# Altium PCB PCB1.PcbDoc
Units mm, origin at the board's own origin, x right, y up, seen from the top; angles counter-clockwise.
Board outline 152.4 x 101.6 mm, 2 copper layers (Top Layer, Bottom Layer); 78 components, 57 nets, 289 pads, 10 vias.
Unrouted connection lines stored in the file: 190.
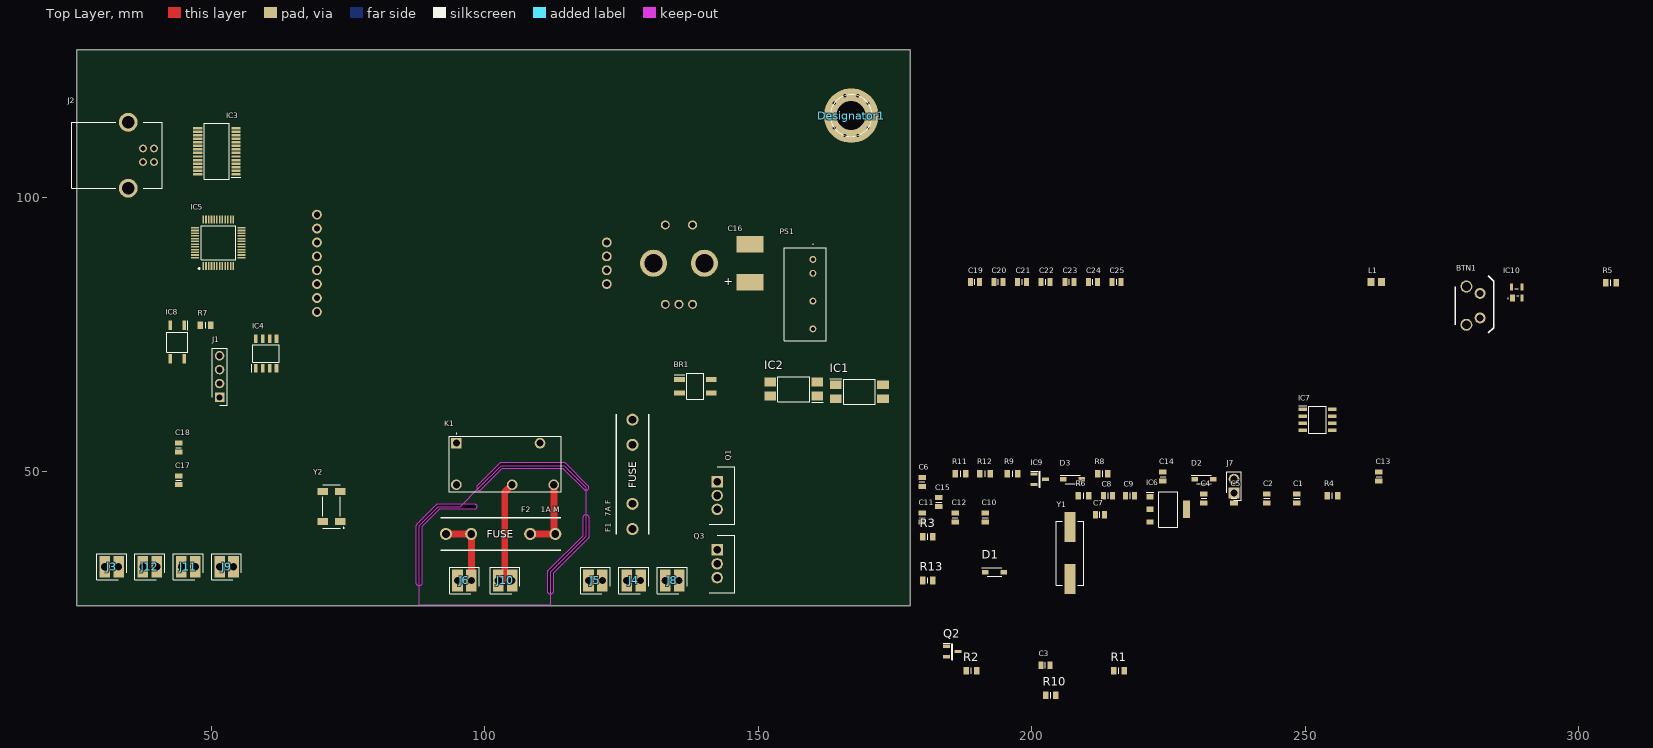
[diagram p0: Top Layer view]
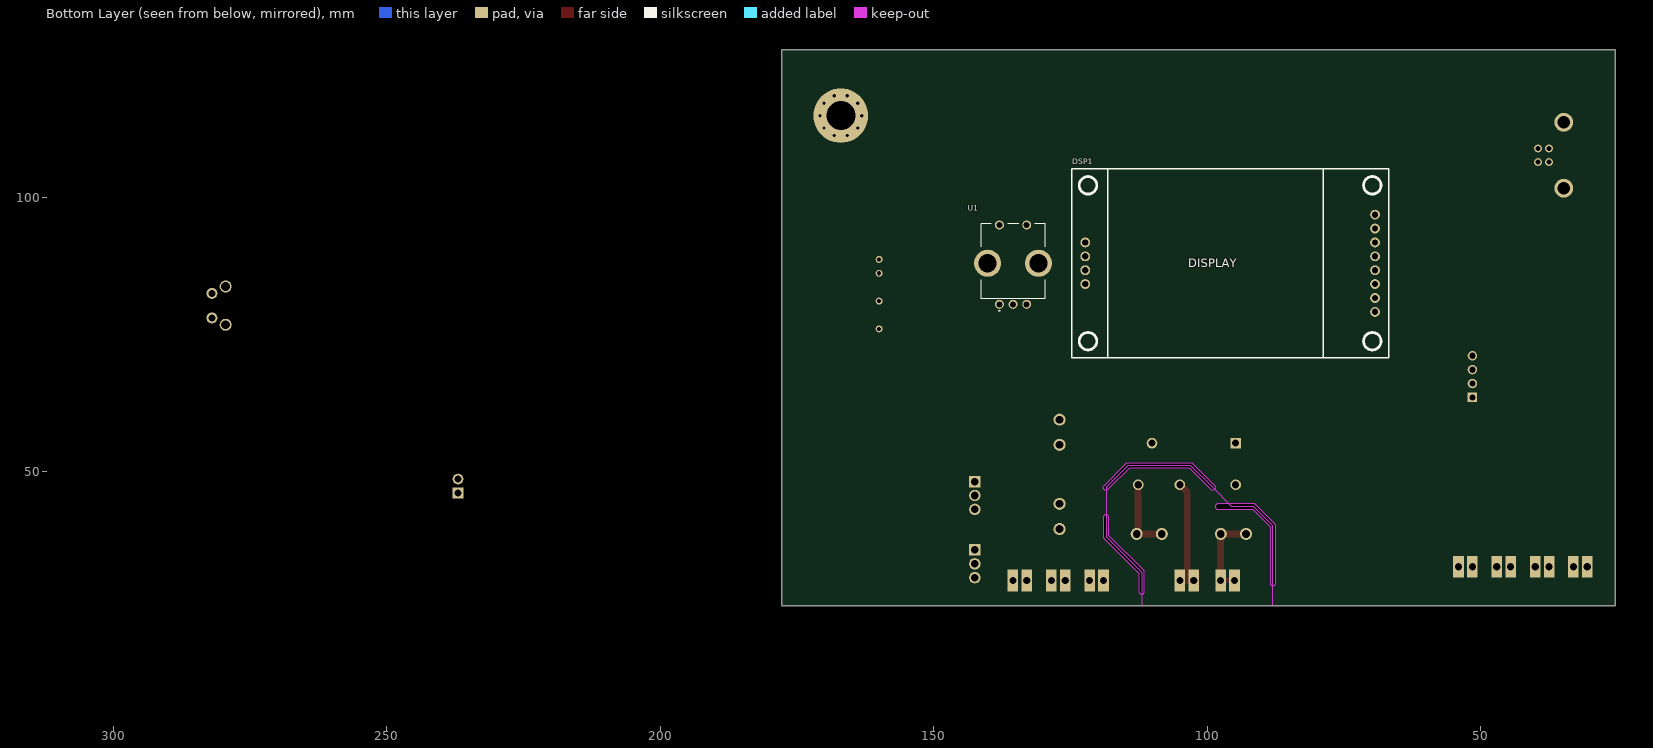
[diagram p1: Bottom Layer view, seen from below]

## Layer stack, top to bottom
Top Solder: solder mask 0.0102, Solder Resist, Dk 3.5
Top Layer: signal copper 0.0356
Dielectric 1: dielectric 0.32, FR-4, Dk 4.8
Bottom Layer: signal copper 0.0356
Bottom Solder: solder mask 0.0102, Solder Resist, Dk 3.5

## Board outline
25.4,25.4 177.8,25.4 177.8,127 25.4,127
cut-out: 98.641,47.359 ccw(c99,47) 99.359,46.641 103.211,50.492 114.289,50.492 118.141,46.641 ccw(c118.5,47) 119.008,47 ccw(c118.5,47) 118.859,47.359 114.859,51.359 114.86,51.359 ccw(c114.5,51) 114.5,51.508 103,51.508 ccw(c103,51) 102.64,51.359
cut-out: 87.492,29.5 87.492,40 cw(c88,40) 87.641,40.36 87.641,40.359 91.141,43.859 91.14,43.859 cw(c91.5,43.5) 91.5,44.008 98,44.008 cw(c98,43.5) 98.508,43.5 cw(c98,43.5) 98,42.992 91.711,42.992 88.508,39.789 88.508,29.5 cw(c88,29.5)
cut-out: 111.492,28 111.492,31.5 cw(c112,31.5) 111.641,31.86 111.641,31.859 117.992,38.211 117.992,41.5 cw(c118.5,41.5) 119.008,41.5 119.008,38 cw(c118.5,38) 118.859,37.64 118.859,37.641 112.508,31.289 112.508,28 cw(c112,28)

## Design rules (kind name [scope] priority, off if disabled: settings)
Clearance [All] p1: gap=0.254 ignorepadtopadclearanceinfootprint=FALSE except(0: Arc-Hole Track-Hole SMDPad-Hole THPad-Hole Via-Hole Fill-Hole Poly-Hole Region-Hole Text-Hole)
PolygonConnect [All] p1: connectstyle=Relief reliefconductorwidth=0.254 reliefentries=4 polygonreliefangle="90 Angle" airgapwidth=0.254
RoutingVias [All] p1: holewidth=0.711 width=1.27 viastyle="Through Hole" minholewidth=0.711 minwidth=1.27 maxholewidth=0.711 maxwidth=1.27
SolderMaskExpansion [All] p1: expansion=0.102 istentingtop=FALSE
Width [All] p1: maxlimit=0.254 minlimit=0.254 preferedwidth=0.254
30 further rules are at their usual default settings.

## Components (designator, comment, footprint, x,y, rotation, side; value= is the part's Value field where it differs from the comment)
BR1 "MB10FTR" SOP250P670X160-4N 138.5,65.5 r0 top
BTN1 "SMD Button 6x6mm Angled" "SMD Button 6x6 Angled" 279.5,76.75 r90 top
C1 "100nF" "CAPC2012 METRIC" 248.5,45 r90 top
C2 "10uF" "CAPC2012 METRIC" 243,45 r90 top
C3 "100nF" "CAPC2012 METRIC" 202.5,14.5 r0 top
C4 "100nF" "CAPC2012 METRIC" 231.5,45 r90 top
C5 "100nF" "CAPC2012 METRIC" 237,45 r90 top
C6 "100nF" "CAPC2012 METRIC" 179.959,48.006 r90 top
C7 "22pF" "CAPC2012 METRIC" 212.5,42 r0 top
C8 "1uF" "CAPC2012 METRIC" 214,45.5 r0 top
C9 "10uF" "CAPC2012 METRIC" 218,45.5 r0 top
C10 "22pF" "CAPC2012 METRIC" 191.5,41.5 r90 top
C11 "10pF" "CAPC2012 METRIC" 180,41.5 r90 top
C12 "10pF" "CAPC2012 METRIC" 186,41.5 r90 top
C13 "100nF" "CAPC2012 METRIC" 263.499,49 r90 top
C14 "1nF" "CAPC2012 METRIC" 224,49 r90 top
C15 "10uF" "CAPC2012 METRIC" 183,44.32 r90 top
C16 "D 100uF" TANTAL-D 148.5,88 r180 top
C17 "1uF" "CAPC2012 METRIC" 44,48.32 r90 top
C18 "10uF" "CAPC2012 METRIC" 44,54.3 r90 top
C19 "1uF" "CAPC2012 METRIC" 189.611,84.582 r0 top
C20 "10nF" "CAPC2012 METRIC" 193.929,84.582 r0 top
C21 "100nF" "CAPC2012 METRIC" 198.247,84.582 r0 top
C22 "100nF" "CAPC2012 METRIC" 202.565,84.582 r0 top
C23 "100nF" "CAPC2012 METRIC" 206.883,84.582 r0 top
C24 "100nF" "CAPC2012 METRIC" 211.201,84.582 r0 top
C25 "4.7uF" "CAPC2012 METRIC" 215.519,84.582 r0 top
D1 "1N5819" SOD3716X145N 193.2,31.5 r0 top
D2 "1N5819" SOD3716X145N 231.5,48.5 r0 top
D3 "1N5819" SOD3716X145N 207.5,48.5 r0 top
Designator1 "Comment" "DRILL HOLE M5" 167,115 r0 top
DSP1 "1.8 In TFT Display" "1.8 Inch TFT Display" 98.5,88 r180 bottom
F1 "7A F" "Fuse Holder 5x20mm" 127,39.4 r90 top
F2 "1A F" "Fuse Holder 5x20mm" 92.9,38.5 r0 top
IC1 "PC817" SOP254P975X460-4N 168.5,64.5 r0 top
IC2 "PC817" SOP254P975X460-4N 156.5,65 r180 top
IC3 "FT232RL" SOP65P778X200-28N 51,108.5 r180 top
IC4 "MAX6675ISA" SOIC127P600X175-8N 60,71.5 r90 top
IC5 "STM32F103C6T6A" QFP50P900X900X160-48N 51.262,91.75 r90 top
IC6 "AMS1117-3.3" SOT229P700X180-4N 225,43 r0 top
IC7 "ACS712 20A" SOIC127P600X175-8N 252.288,59.365 r0 top
IC8 "VOM1271T" SOP254P675X240-4N 43.73,73.575 r270 top
IC9 "BC846BLT1G" SOT96P237X111-3N 201.5,48.5 r0 top
IC10 "MAX811TEUS+" MAX811REUST 288.671,82.677 r0 top
J1 "PROG" HDRV4W95P0X254_1X4_1016X254X854P 51.5,63.46 r90 top
J2 "USB Type B" SS52300001 39.5,109 r270 top
J3 "Base" "2 Pin Header BIG PADS" 33.04,32.5 r180 top
J4 "24VA" "2 Pin Header BIG PADS" 128.5,30 r180 top
J5 "PE In" "2 Pin Header BIG PADS" 121.5,30 r180 top
J6 "230V In" "2 Pin Header BIG PADS" 97.54,30 r180 top
J7 "Power BTN" HDRV2W110P0X254_1X2_508X254X854P 237,46 r90 top
J8 "24VB" "2 Pin Header BIG PADS" 135.54,30 r180 top
J9 "JBC Red" "2 Pin Header BIG PADS" 54.04,32.5 r180 top
J10 "230V SW" "2 Pin Header BIG PADS" 105,30 r180 top
J11 "JBC Blue" "2 Pin Header BIG PADS" 47.04,32.5 r180 top
J12 "JBC Green" "2 Pin Header BIG PADS" 40,32.5 r180 top
K1 "SJE-S-105L-F" SJES105LF 94.8,55.1 r0 top
L1 "39nH" LIRD-LI0805H151R-10-2_V 263.017,84.582 r0 top
PS1 "TMR 1-2411" TMR10511 160,88.7 r270 top
Q1 "IRFZ44PBF" TO254P465X1024X2050-3P 142.5,48.08 r270 top
Q2 "BSS138LT1G" SOT96P237X111-3N 185.5,17 r0 top
Q3 "IRFZ44PBF" TO254P465X1024X2050-3P 142.5,35.58 r270 top
R1 "2k" RESC2012X65N 215.95,13.5 r0 top
R2 "10k" RESC2012X65N 189,13.5 r0 top
R3 "10k" RESC2012X65N 181,38 r0 top
R4 "10k" RESC2012X65N 254.999,45.5 r0 top
R5 "10k" RESC2012X65N 305.943,84.455 r0 top
R6 "10k" RESC2012X65N 209.5,45.5 r0 top
R7 "330" RESC2012X65N 48.95,76.65 r0 top
R8 "2k" RESC2012X65N 213,49.5 r0 top
R9 "2k" RESC2012X65N 196.5,49.5 r0 top
R10 "1k" RESC2012X65N 203.5,9 r0 top
R11 "10k" RESC2012X65N 187,49.5 r0 top
R12 "200k" RESC2012X65N 191.5,49.5 r0 top
R13 "200k" RESC2012X65N 181,30 r0 top
U1 "Encoder" EC11B152442D 135.5,87.512 r180 bottom
Y1 "HC-49S 8MHz" FOX-HC49SDLF_V 207,35 r90 top
Y2 "MC-306 32.768kHz" MC306327680KA3ROHS 72,43.5 r90 top

## Footprints (in the part's own frame and the unit in brackets; to place one, negate y for a bottom-side part, rotate by r counter-clockwise, add the part's x,y. Pads: shape width x height; smd on the part's side, far side on the other; paste and mask are expansions set on the pad)
"1.8 Inch TFT Display" [mm]
  round 1.8 hole 1.15: 1(29.2,8.89) 2(29.2,6.35) 3(29.2,3.81) 4(29.2,1.27) 5(29.2,-1.27) 6(29.2,-3.81) 7(29.2,-6.35) 8(29.2,-8.89) 9(-23.8,3.81) 10(-23.8,1.27) 11(-23.8,-1.27) 12(-23.8,-3.81)
  silkscreen extent -26.3,-17.25 31.7,17.25
"2 Pin Header BIG PADS" [mm]
  rect 1.95x4 hole 1.3: 1(0,0) 2(2.54,0)
  silkscreen extent -1.4,-2.4 3.99,2.42
"CAPC2012 METRIC" [mm]
  rect 0.91x1.39 smd: 1(-0.82,0) 2(0.82,0)
  silkscreen extent 0,-0.53 0,0.53, body extent -1,-0.63 1,0.63, height 0.95
"DRILL HOLE M5" [mm]
  round 10 hole 5.3 mask+0: 1(0,0)
  silkscreen extent -3.82,-3.82 3.83,3.82
EC11B152442D [mm]
  round 1.65 hole 1.1: A(-2.5,-7.012) B(2.5,-7.012) C(0,-7.012) MH3(-2.5,7.488) MH4(2.5,7.488)
  round 4.95 hole 3.3: MH1(-4.65,0.488) MH2(4.65,0.488)
  silkscreen extent -5.85,-8.31 5.85,7.74, body extent -6.19,-7.46 6.2,7.94, height 31.1
FOX-HC49SDLF_V [mm] "SMD, 2-Leads, Body 5x11.7mm"
  rect 5.5x2 smd: 1(-4.75,0) 2(4.75,0)
  silkscreen extent -5.85,-2.5 5.85,2.5, body extent -6.15,-2.35 6.15,2.35, height 4.34
"Fuse Holder 5x20mm" [mm]
  round 2.2 hole 1.4: 1(0,0) 1(4.6,0) 2(15.4,0) 2(20,0)
  silkscreen extent -1,-3 21,3
HDRV2W110P0X254_1X2_508X254X854P [mm]
  rect 1.95x1.95 hole 1.3: 1(0,0)
  round 1.95 hole 1.3: 2(2.54,0)
  silkscreen extent -1.35,-1.35 3.89,1.35, body extent -1.27,-1.27 3.81,1.27, height 8.54
HDRV4W95P0X254_1X4_1016X254X854P [mm]
  rect 1.725x1.725 hole 1.15: 1(0,0)
  round 1.725 hole 1.15: 2(2.54,0) 3(5.08,0) 4(7.62,0)
  silkscreen extent -1.42,-1.37 9.04,1.37, body extent -1.27,-1.27 8.89,1.27, height 8.54
LIRD-LI0805H151R-10-2_V [mm] "Chip, 2-Leads, Body 2.2x1.45mm"
  rect 1.285x1.47 smd: 1(-0.972,0) 2(0.972,0)
  body extent -1.1,-0.72 1.1,0.73, height 1.1
MAX811REUST [mm]
  rect 0.94x1.31 smd: 1(-0.765,-1)
  rect 0.55x1.31 smd: 2(0.96,-1) 3(0.96,1) 4(-0.96,1)
  silkscreen extent -1.6,-1.15 0.4,0.65
MC306327680KA3ROHS [mm]
  rect 1.3x1.9 smd: 1(-2.75,-1.6) 2(2.75,-1.6) 3(2.75,1.6) 4(-2.75,1.6)
  silkscreen extent -4,-2.3 4,1.6, body extent -4,-2.42 4,2.42, height 2.64
QFP50P900X900X160-48N [mm]
  rect 1.475x0.3 smd mask+0.127: 1(-4.238,2.75) 2(-4.238,2.25) 3(-4.238,1.75) 4(-4.238,1.25) 5(-4.238,0.75) 6(-4.238,0.25) 7(-4.238,-0.25) 8(-4.238,-0.75) 9(-4.238,-1.25) 10(-4.238,-1.75) 11(-4.238,-2.25) 12(-4.238,-2.75) 25(4.238,-2.75) 26(4.238,-2.25) 27(4.238,-1.75) 28(4.238,-1.25) 29(4.238,-0.75) 30(4.238,-0.25) 31(4.238,0.25) 32(4.238,0.75) 33(4.238,1.25) 34(4.238,1.75) 35(4.238,2.25) 36(4.238,2.75)
  rect 0.3x1.475 smd mask+0.127: 13(-2.75,-4.238) 14(-2.25,-4.238) 15(-1.75,-4.238) 16(-1.25,-4.238) 17(-0.75,-4.238) 18(-0.25,-4.238) 19(0.25,-4.238) 20(0.75,-4.238) 21(1.25,-4.238) 22(1.75,-4.238) 23(2.25,-4.238) 24(2.75,-4.238) 37(2.75,4.238) 38(2.25,4.238) 39(1.75,4.238) 40(1.25,4.238) 41(0.75,4.238) 42(0.25,4.238) 43(-0.25,4.238) 44(-0.75,4.238) 45(-1.25,4.238) 46(-1.75,4.238) 47(-2.25,4.238) 48(-2.75,4.238)
  silkscreen extent -4.85,-3.15 3.15,3.62, body extent -4.5,-4.5 4.5,4.5, height 1.6
RESC2012X65N [mm]
  rect 1x1.4 smd: 1(-0.95,0) 2(0.95,0)
  silkscreen extent 0,-0.53 0,0.53, body extent -1,-0.63 1,0.63, height 0.65
SJES105LF [mm]
  rect 1.95x1.95 hole 1.3: 1(0,0)
  round 1.95 hole 1.3: 2(0,-7.6) 3(10.2,-7.6) 4(17.8,-7.6) 5(15.3,0)
  silkscreen extent -1.4,-8.9 19.2,1.8, body extent -1.4,-8.9 19.2,1.3, height 16.2
"SMD Button 6x6 Angled" [mm]
  round 2 hole 1.3: 1(1.25,-2.5) 2(5.75,-2.5)
  round 2.2 hole 1.6: 3(0,0) 4(7,0)
  silkscreen extent -1.5,-5.05 9,2
SOD3716X145N [mm]
  rect 1.2x0.75 smd: 1(-1.7,0) 2(1.7,0)
  silkscreen extent -2.3,-0.77 1.35,0.77, body extent -1.85,-0.77 1.85,0.77, height 1.45
SOIC127P600X175-8N [mm]
  rect 1.525x0.65 smd: 1(-2.712,1.905) 2(-2.712,0.635) 3(-2.712,-0.635) 4(-2.712,-1.905) 5(2.712,-1.905) 6(2.712,-0.635) 7(2.712,0.635) 8(2.712,1.905)
  silkscreen extent -3.47,-2.45 1.6,2.58, body extent -3,-2.45 3,2.45, height 1.75
SOP65P778X200-28N [mm]
  rect 1.7x0.45 smd: 1(-3.5,4.225) 2(-3.5,3.575) 3(-3.5,2.925) 4(-3.5,2.275) 5(-3.5,1.625) 6(-3.5,0.975) 7(-3.5,0.325) 8(-3.5,-0.325) 9(-3.5,-0.975) 10(-3.5,-1.625) 11(-3.5,-2.275) 12(-3.5,-2.925) 13(-3.5,-3.575) 14(-3.5,-4.225) 15(3.5,-4.225) 16(3.5,-3.575) 17(3.5,-2.925) 18(3.5,-2.275) 19(3.5,-1.625) 20(3.5,-0.975) 21(3.5,-0.325) 22(3.5,0.325) 23(3.5,0.975) 24(3.5,1.625) 25(3.5,2.275) 26(3.5,2.925) 27(3.5,3.575) 28(3.5,4.225)
  silkscreen extent -4.35,-5.14 2.3,5.14, body extent -3.89,-5.14 3.89,5.14, height 2
SOP250P670X160-4N [mm]
  rect 1.95x0.95 smd: 1(-2.9,1.25) 2(-2.9,-1.25) 3(2.9,-1.25) 4(2.9,1.25)
  silkscreen extent -3.88,-2.36 1.58,2.36, body extent -3.35,-2.36 3.35,2.36, height 1.6
SOP254P675X240-4N [mm]
  rect 1.75x0.65 smd: 1(-3.075,1.27) 2(-3.075,-1.27) 3(3.075,-1.27) 4(3.075,1.27)
  silkscreen extent -3.95,-1.92 1.85,1.94, body extent -3.37,-1.92 3.37,1.92, height 2.4
SOP254P975X460-4N [mm]
  rect 2.125x1.6 smd: 1(-4.312,1.27) 2(-4.312,-1.27) 3(4.312,-1.27) 4(4.312,1.27)
  silkscreen extent -5.37,-2.29 2.9,2.42, body extent -4.81,-2.29 4.81,2.29, height 3.85
SOT96P237X111-3N [mm]
  rect 1.25x0.6 smd: 1(-1.05,0.955) 2(-1.05,-0.955) 3(1.05,0)
  silkscreen extent -1.68,-1.46 0.08,1.51, body extent -1.18,-1.46 1.18,1.46, height 1.11
SOT229P700X180-4N [mm]
  rect 1.3x0.95 smd: 1(-3.35,2.29) 2(-3.35,0) 3(-3.35,-2.29)
  rect 1.3x3.25 smd: 4(3.35,0)
  silkscreen extent -4,-3.25 1.75,3.25, body extent -3.5,-3.25 3.5,3.25, height 1.8
SS52300001 [mm]
  round 1.431 hole 0.92: 1(2.5,0) 2(0,0) 3(0,-2) 4(2.5,-2)
  round 3.45 hole 2.3: MH1(-4.77,-4.71) MH2(7.27,-4.71)
  silkscreen extent -4.77,-14.99 7.27,1.51, body extent -6.22,-14.99 8.72,1.51, height 10.62
TANTAL-D [mm]
  rect 5x3 / inner rect 3x2 / far side rect 0x0 all layers, no hole mask+0.102: 1(0,3.5) 2(0,-3.5)
TMR10511 [mm]
  round 1.26 hole 0.76: 1(0,0) 2(2.54,0) 4(7.62,0) 6(12.7,0)
  silkscreen extent -2.82,-5.22 14.85,2.4, body extent -2.36,-5.29 15.04,2.47, height 11.23
TO254P465X1024X2050-3P [mm]
  rect 2.085x2.085 hole 1.39: 1(0,0)
  round 2.085 hole 1.39: 2(2.54,0) 3(5.08,0)
  silkscreen extent -2.72,-1.42 7.8,3.22, body extent -2.58,-1.43 7.66,3.22, height 18.77

## Part data
BR1: "Bridge Rectifier", Manufacturer_Name="SMC Diode Solutions", Datasheet Link=http://www.smc-diodes.com/propdf/MB05F-MB10F%20N1456%20REV.A.pdf, Height=1.6mm, Manufacturer_Part_Number=MB10FTR
C1 C2 C3 C4 C5 C6 C7 C8 C9 C10 C11 C12 C13 C14 C15 C17 C18 C19 C20 C21 C22 C23 C24 C25: library part CL21B104KACNNNC, "Capacitor", Manufacturer_Name="Samsung Electro-Mechanics", Mouser Part Number=N/A, Arrow Part Number=CL21B104KACNNNC, Arrow Price/Stock=https://www.arrow.com/en/products/cl21b104kacnnnc/samsung-electro-mechanics, Datasheet Link=http://www.samsungsem.com/kr/support/product-search/mlcc/__icsFiles/afieldfile/2016/08/18/S_CL21B104KACNNNC.pdf, Height=0.95mm, Manufacturer_Part_Number=CL21B104KACNNNC, Mouser Price/Stock=https://www.mouser.co.uk/ProductDetail/Samsung-Electro-Mechanics/CL21B104KACNNNC?qs=yOVawPpwOwnhB47kNbieFw%3D%3D
C16: library part TANTAL-D, "Capacitor Tantalum"
D1 D2 D3: library part 1N5819HW-7-F, "Diode", Manufacturer_Name="Diodes Inc.", Mouser Part Number=621-1N5819HW-F, Arrow Part Number=1N5819HW-7-F, Arrow Price/Stock=https://www.arrow.com/en/products/1n5819hw-7-f/diodes-incorporated, Datasheet Link=http://www.diodes.com/_files/datasheets/ds30217.pdf, Height=1.45mm, Manufacturer_Part_Number=1N5819HW-7-F, Mouser Price/Stock=https://www.mouser.co.uk/ProductDetail/Diodes-Incorporated/1N5819HW-7-F/?qs=NQ47qNm99eDyWTEd07miYA%3D%3D
DSP1: library part "TFT Display 1.8In SPI", "Display"
F1 F2: library part "Fuse Holder 5x20mm"
IC1 IC2: library part PC817X2NIP0F, "Integrated Circuit", Manufacturer_Name="Sharp Microelectronics", Mouser Part Number=N/A, Datasheet Link=https://ew.componentsearchengine.com/Datasheets/2/PC817X2NIP0F.pdf, Height=4.6mm, Manufacturer_Part_Number=PC817X2NIP0F, Mouser Price/Stock=https://www.mouser.co.uk/ProductDetail/Sharp-Microelectronics/PC817X2NIP0F?qs=je7EQiYm86lhc4x%252BMeaZDQ%3D%3D
IC3: "Integrated Circuit", Manufacturer_Name="FTDI Chip", Arrow Part Number=FT232RL, Arrow Price/Stock=https://www.arrow.com/en/products/ft232rl/ftdi-chip, Datasheet Link=http://www.ftdichip.com/Support/Documents/DataSheets/ICs/DS_FT232R.pdf, Height=2mm, Manufacturer_Part_Number=FT232RL
IC4: "Integrated Circuit", Manufacturer_Name="Maxim Integrated", Mouser Part Number=N/A, Datasheet Link=http://datasheets.maximintegrated.com/en/ds/MAX6675.pdf, Height=1.75mm, Manufacturer_Part_Number=MAX6675ISA, Mouser Price/Stock=https://www.mouser.com/Search/Refine.aspx?Keyword=N%2FA
IC5: "Integrated Circuit", Manufacturer_Name=STMicroelectronics, Mouser Part Number=511-STM32F103C6T6A, Arrow Part Number=STM32F103C6T6A, Arrow Price/Stock=https://www.arrow.com/en/products/stm32f103c6t6a/stmicroelectronics, Datasheet Link=http://www.st.com/st-web-ui/static/active/en/resource/technical/document/datasheet/CD00210843.pdf, Height=1.6mm, Manufacturer_Part_Number=STM32F103C6T6A, Mouser Price/Stock=https://www.mouser.co.uk/ProductDetail/STMicroelectronics/STM32F103C6T6A?qs=%252BB84zevwoRBiGXbwVLvaMw%3D%3D
IC6: "Integrated Circuit", Manufacturer_Name="Advanced Monolithic Systems", Datasheet Link=http://www.advanced-monolithic.com/pdf/ds1117.pdf, Height=1.8mm, Manufacturer_Part_Number=AMS1117-3.3
IC7: library part ACS712ELCTR-05B-T, "Integrated Circuit", Manufacturer_Name="Sharp Microelectronics", Datasheet Link=https://www.allegromicro.com/~/media/Files/Datasheets/ACS712-Datasheet.ashx, Height=1.75mm, Manufacturer_Part_Number=ACS712ELCTR-05B-T
IC8: "Integrated Circuit", Manufacturer_Name=Vishay, Mouser Part Number=78-VOM1271T, Arrow Part Number=VOM1271T, Arrow Price/Stock=https://www.arrow.com/en/products/vom1271t/vishay?region=nac, Datasheet Link=http://www.mouser.com/ds/2/427/vom1271t-244790.pdf, Height=2.4mm, Manufacturer_Part_Number=VOM1271T, Mouser Price/Stock=https://www.mouser.co.uk/ProductDetail/Vishay-Semiconductors/VOM1271T?qs=9vrc9xEJKyxSd3E39M%252BFqQ%3D%3D
IC9: "Integrated Circuit", Manufacturer_Name="ON Semiconductor", Mouser Part Number=863-BC846BLT1G, Arrow Part Number=BC846BLT1G, Arrow Price/Stock=https://www.arrow.com/en/products/bc846blt1g/on-semiconductor, Datasheet Link=http://www.onsemi.com/pub/Collateral/BC846ALT1-D.PDF, Height=1.11mm, Manufacturer_Part_Number=BC846BLT1G, Mouser Price/Stock=https://www.mouser.co.uk/ProductDetail/onsemi/BC846BLT1G?qs=vNc2DXHODiJuwwGLruzsRg%3D%3D
IC10: "Integrated Circuit", Manufacturer_Name="Maxim Integrated", Datasheet Link=https://pdfserv.maximintegrated.com/en/ds/MAX811-MAX812.pdf, Manufacturer_Part_Number=MAX811TEUS+
J1: library part 61300411121, "Connector", Manufacturer_Name="Wurth Elektronik", Mouser Part Number=710-61300411121, Datasheet Link=http://katalog.we-online.de/em/datasheet/6130xx11121.pdf, Height=8.54mm, Manufacturer_Part_Number=61300411121, Mouser Price/Stock=https://www.mouser.co.uk/ProductDetail/Wurth-Elektronik/61300411121?qs=PhR8RmCirEYQcLLqXD8rAA%3D%3D
J2: library part "USB Type B Connector", "Connector", Manufacturer_Name=Bel, Manufacturer_Part_Number=SS-52300-001, Mouser Part Number=530-SS-52300-001, Datasheet Link=https://belfuse.com/resources/datasheets/stewartconnector/ds-stw-usb-2.0-type-b-connectors.pdf, Height=10.82mm
J3 J4 J5 J6 J8 J9 J10 J11 J12: library part "2 Pin Header Big Pad", "Connector", Manufacturer_Name="Wurth Elektronik", Manufacturer_Part_Number=61300211121, Mouser Part Number=710-61300211121, Datasheet Link=https://componentsearchengine.com/Datasheets/2/61300211121.pdf, Height=8.54mm, Mouser Price/Stock=https://www.mouser.co.uk/ProductDetail/Wurth-Elektronik/61300211121/?qs=t4813l51qx%252B1A5GYDQxPlw%3D%3D
J7: library part 61300211121, "Connector", Manufacturer_Name="Wurth Elektronik", Mouser Part Number=710-61300211121, Datasheet Link=https://componentsearchengine.com/Datasheets/2/61300211121.pdf, Height=8.54mm, Manufacturer_Part_Number=61300211121, Mouser Price/Stock=https://www.mouser.co.uk/ProductDetail/Wurth-Elektronik/61300211121/?qs=t4813l51qx%252B1A5GYDQxPlw%3D%3D
K1: "Relay or Contactor", Manufacturer_Name="Sanyou Relays", Datasheet Link=https://4donline.ihs.com/images/VipMasterIC/IC/SAEA/SAEAS00006/SAEAS00006-1.pdf?hkey=EF798316E3902B6ED9A73243A3159BB0, Height=16.1mm, Manufacturer_Part_Number=SJE-S-105L-F
L1: library part CMP-2000-06404-1, "Chip Bead, 100 MHz, 5 A, -40 to 125 degC, 2-Pin SMD (0805), RoHS, Tape and Reel", Current Rating (Max)=5A, DC Resistance (DCR) (Max)=10mOhm, Impedance @ Frequency=80Ohm@100MHz, Manufacturer=Laird, Operating Temperature=-40°C~125°C, Package / Case=0805(2012Metric), Package Description="2-Pin Surface Mount Device, Body 2 x 1.25 mm", Package Reference=LI0805H15R-10-2, Package Version="Rev. D, 08/2013", Ratings=-, Standard Package=1, Catalog Drawings=(HI,HZ,LI,MI)0805Series_1.10mmMax.Height, Category=Filters, Datasheet URL=http://cdn.lairdtech.com/home/brandworld/files/HI0805R800R-10.pdf, Datasheet Version="Rev. E, 08/2013", Family=FerriteBeadsandChips, Filter Type=Power,SignalLine, Height (Max)="0.043\"(1.10mm)", Kits=240-2227-ND-KITEMIFERRITEBEADCHIPSMD, Manufacturer URL=https://www.lairdtech.com/, Mounting Technology=SurfaceMount, Mounting Type=SurfaceMount, Number of Lines=1, Online Catalog=HISeries, Other Names=240-2395-1, Package URL=http://cdn.lairdtech.com/home/brandworld/files/LI0805H151R-10.pdf, Packaging=CutTape(CT), Series=HI, Size / Dimension="0.079\"Lx0.049\"W(2.00mmx1.25mm)"
PS1: library part TMR_1-2411, "Power Supply", Manufacturer_Name="Traco Power", Mouser Part Number=495-TMR-1-2411, Datasheet Link=https://tracopower.com/tmr1-datasheet/, Height=11.5mm, Manufacturer_Part_Number="TMR 1-2411", Mouser Price/Stock=https://www.mouser.co.uk/ProductDetail/TRACO-Power/TMR-1-2411?qs=ckJk83FOD0UjkjrMKL4VtA%3D%3D
Q1 Q3: "MOSFET (N-Channel)", Manufacturer_Name=Vishay, Mouser Part Number=844-IRFZ44PBF, Arrow Part Number=IRFZ44PBF, Arrow Price/Stock=https://www.arrow.com/en/products/irfz44pbf/vishay?region=europe, Datasheet Link=https://www.vishay.com/docs/91291/91291.pdf, Height=4.65mm, Manufacturer_Part_Number=IRFZ44PBF, Mouser Price/Stock=https://www.mouser.co.uk/ProductDetail/Vishay-Semiconductors/IRFZ44PBF?qs=%2FRKvNCQzLu0R%252BpFoqVUQ5w%3D%3D
Q2: "MOSFET (N-Channel)", Manufacturer_Name="ON Semiconductor", Mouser Part Number=863-BSS138LT1G, Arrow Part Number=BSS138LT1G, Arrow Price/Stock=https://www.arrow.com/en/products/bss138lt1g/on-semiconductor?region=nac, Datasheet Link=http://www.onsemi.com/pub/Collateral/BSS138LT1-D.PDF, Height=1.11mm, Manufacturer_Part_Number=BSS138LT1G, Mouser Price/Stock=https://www.mouser.co.uk/ProductDetail/onsemi/BSS138LT1G?qs=vNc2DXHODiKPZ2y3rQhTYQ%3D%3D
R1 R2 R3 R4 R5 R6 R7 R8 R9 R10 R11 R12 R13: library part "Res 0805", "Resistor", Arrow Part Number=RMCF0805ZT0R00, Manufacturer_Name="Stackpole Electronics Inc.", Arrow Price/Stock=https://www.arrow.com/en/products/rmcf0805zt0r00/stackpole-electronics, Datasheet Link=https://www.seielect.com/Catalog/SEI-RMCF_RMCP.pdf, Height=0.65mm, Manufacturer_Part_Number=RMCF0805ZT0R00
U1: library part EC11B152442D, Manufacturer_Name=ALPS, Mouser Part Number=N/A, Height=31mm, Manufacturer_Part_Number=EC11B152442D, Mouser Price/Stock=https://www.mouser.com/Search/Refine.aspx?Keyword=N%2FA
Y1: library part CMP-2100-03639-1, "Resistance Weld Crystal, 8 MHz, +/- 30 ppm, -20 to 70 degC, 2-Pin SMD, RoHS, Tape and Reel", Case/Package=SMD/SMT, ESR (Equivalent Series Resistance)=80Ohm, Frequency=8MHz, Frequency Stability=50ppm, Frequency Tolerance=30ppm, Load Capacitance=20pF, Manufacturer="FOX Electronics", Max Operating Temperature=70degC, Min Operating Temperature=-20degC, Package Description="2-Pin Surface Mount Device, Body 5 x 11.7 mm", Package Quantity=1000, Package Reference=HC49SDLF, Datasheet URL=http://www.foxonline.com/pdfs/hc49sdlf.pdf, Datasheet Version=42064.0, Depth=5mm, Height=4.5mm, Lead Free=LeadFree, Length=11.7mm, Manufacturer URL=http://www.foxonline.com/, Mount=SurfaceMount, Number of Pins=2, Packaging=TapeandReel, Radiation Hardening=No, REACH SVHC=NoSVHC, RoHSCompliant=True, Series Resistance=80Ohm, Termination=SMD/SMT, Tolerance=50ppm, Width=5mm
Y2: library part MC-306_32.7680K-A3_ROHS, "Crystal or Oscillator", Manufacturer_Name="Epson Timing", Manufacturer_Part_Number="MC-306 32.7680K-A3:ROHS", Mouser Part Number=732-MC306-32.7KA3R, Datasheet Link="https://componentsearchengine.com/Datasheets/1/MC-306 32.7680K-A3_ROHS.pdf", Height=2.54mm, Mouser Price/Stock=https://www.mouser.co.uk/ProductDetail/Epson-Timing/MC-306-327680K-A3ROHS/?qs=CU9taR8hkvbxBMNmXnQ1pw%3D%3D

## Via types
v1: diameter 1, hole 0.6, Top Layer to Bottom Layer, 10 vias

## Nets (pads, with @x,y where several pads share a name; then routed paths per layer and width w, separated by ;. In a path a pad name is that pad's centre, name@x,y a point inside that pad or via, vN(x,y) a via of type N, cw(c..) or ccw(c..) an arc to the next point about the centre after c; other vN are vias at no path point)
3V3: C6.2 C9.1 C21.2 C22.2 C23.2 C24.2 C25.2 IC3.4 IC4.4 IC5.1 IC5.24 IC5.36 IC5.48 IC6.2 IC6.4 IC10.4 J7.2 L1.1 R2.1 R3.1 R4.2 R6.1
3V3A: C19.2 C20.2 IC5.9 L1.2
5V: C1.1 C2.1 C8.1 C13.2 C18.2 D1.2 D2.1 DSP1.8 IC3.20 IC6.3 IC7.8 K1.2 PS1.4 R7.2
24V0V: BR1.4 C16.2 C17.1 PS1.1
24VA: F1.1 J4.1 J4.2
24VAF: BR1.1 F1.2 IC7.1 IC7.2 R1.2
24VB: BR1.2 IC1.1 IC2.2 J8.1 J8.2 J11.1 J11.2
24VDC: BR1.3 C16.1 C17.2 PS1.2
230VIN: F2.1 J6.1 J6.2 | length 15.7
  Top Layer w1.016: J6.2 J6.1
  Top Layer w1.27: F2.1@92.9,38.5 97.5,38.5 97.54,38.46 J6.1
230VSW: J10.1 J10.2 K1.3 | length 20.1
  Top Layer w1.016: J10.2 103.5,30
  Top Layer w1.27: 103.5,30 J10.1 ; 103.642,30.5 103.642,46.142 K1.3
ACSOUT: IC7.7 R9.2
BASESENSE: IC5.33 J3.1 J3.2 R6.2
ENCA: C4.2 IC5.41 U1.A
ENCB: C5.2 IC5.40 U1.B
ENCBTN: C3.2 IC5.32 R4.1 U1.MH3
GerritsKram: J7.1 R8.2
GND: BTN1.1 BTN1.3 BTN1.4 C1.2 C2.2 C3.1 C4.1 C5.1 C6.1 C7.2 C8.2 C9.2 C10.2 C11.1 C12.1 C13.1 C14.1 C15.2 C18.1 C19.1 C20.1 C21.1 C22.1 C23.1 C24.1 C25.1 Designator1.1 DSP1.7 IC1.3 IC2.3 IC3.7 IC3.18 IC3.21 IC3.25 IC3.26 IC4.1 IC4.2 IC5.8 IC5.23 IC5.35 IC5.47 IC6.1 IC7.5 IC9.2 IC10.1 J1.1 J2.4 J2.MH1 J2.MH2 J5.1 J5.2 J12.1 J12.2 PS1.6 Q2.2 R5.2 R11.2 R12.1 R13.1 U1.C U1.MH1 U1.MH2 U1.MH4 Y2.2 Y2.3
  other v1: 165.818,111.362 168.182,111.362 163.906,112.752 170.094,112.752 163.175,115 170.825,115 163.906,117.248 170.094,117.248 165.818,118.638 168.182,118.638
HEATCUR: C15.1 D3.1 IC5.10
HEATPWM: IC5.29 R10.2
JBCRED: IC4.3 J9.1 J9.2 Q3.2
MAXSS: IC4.6 IC5.18
MISO: IC4.7 IC5.16
MOSI: DSP1.3 IC5.17
NetBTN1_2: BTN1.2 IC10.3
NetC14_2: C14.2 IC7.6
NetD1_1: D1.1 J2.1
NetD2_2: D2.2 IC9.3 K1.1
NetD3_2: D3.2 R9.1 R11.1
NetF2_2: F2.2 K1.4 | length 13.7
  Top Layer w1.27: F2.2@108.3,38.5 112.9,38.5 112.9,38.752 112.616,39.036 K1.4@112.616,47.5
NetIC1_2: IC1.2 IC2.1 R1.1
NetIC5_44: IC5.44 R5.1
NetIC7_3: IC7.3 IC7.4 Q1.2
NetIC8_1: IC8.1 R7.1
NetIC8_2: IC8.2 Q2.3
NetIC8_3: IC8.3 Q1.3 Q3.3
NetIC8_4: IC8.4 Q1.1 Q3.1
NetIC9_1: IC9.1 R8.1 R12.2
NetQ2_1: Q2.1 R10.1 R13.2
NRST: IC5.7 IC10.2
OSC8IN: C11.2 IC5.5 Y1.1
OSC8OUT: C12.2 IC5.6 Y1.2
OSC32IN: C7.1 IC5.3 Y2.4
OSC32OUT: C10.1 IC5.4 Y2.1
PCRX: IC3.5 IC5.30
PCTX: IC3.1 IC5.31
PCUSBD+: IC3.15 J2.3
PCUSBD-: IC3.16 J2.2
SCLK: DSP1.2 IC4.5 IC5.15
SWCLK: IC5.37 J1.3
SWDIO: IC5.34 J1.4
SWO: IC5.39 J1.2
TFTA0: DSP1.4 IC5.27
TFTLED: DSP1.1 IC5.28
TFTRST: DSP1.5 IC5.25
TFTSS: DSP1.6 IC5.26
ZCD1: IC2.4 IC5.21 R2.2
ZCD2: IC1.4 IC5.20 R3.2
pads on no net: DSP1.9 DSP1.10 DSP1.11 DSP1.12 IC3.2 IC3.3 IC3.6 IC3.8 IC3.9 IC3.10 IC3.11 IC3.12 IC3.13 IC3.14 IC3.17 IC3.19 IC3.22 IC3.23 IC3.24 IC3.27 IC3.28 IC4.8 IC5.2 IC5.11 IC5.12 IC5.13 IC5.14 IC5.19 IC5.22 IC5.38 IC5.42 IC5.43 IC5.45 IC5.46 K1.5

## Keep-outs
Top Layer:
  region: 88,25.5 88,40 91.5,43.5 95.5,43.5 99,47 103,51 114.5,51 118.5,47 118.5,38 112,31.5 112,25.5
Bottom Layer:
  region: 88,25.5 88,40 91.5,43.5 95.5,43.5 99,47 103,51 114.5,51 118.5,47 118.5,38 112,31.5 112,25.5

## Silkscreen, mask and mechanical layers (free items; w line width, h text height)
Top Overlay:
  text "1A M" at 110.251,42.5 h1
  text "7A F" at 123,41.667 h1 r90
Mechanical 2:
  lines w1.016: 88,29.5 88,40 91.5,43.5 98,43.5 ; 99,47 103,51 114.5,51 118.5,47 ; 112,28 112,31.5 118.5,38 118.5,41.5

## Text inside footprints (layer, text, board x,y; h text height)
C16: Top Overlay "+" at 145.408,85.262 h1.52 r180
DSP1: Bottom Overlay "DISPLAY" at 103.451,87.238 h1.52
F1: Top Overlay "FUSE" at 127.7,46.834 h1.4 r90
F2: Top Overlay "FUSE" at 100.334,37.8 h1.4